# EAGLE board CT_schematic (EAGLE 7.6.0)

Size 100 x 80 mm. Coordinates in mm from the lower left corner, seen from the top.
Outline: 0,0 100,0 100,80 0,80 0,0
Copper layers (1*16): Top 0.035mm / dielectric 1.5mm / Bottom 0.035mm
Design rules "default": minimum track width 10mil, minimum drill 24mil, track to track 8mil, track to pad 8mil, pad to pad 8mil, via to via 8mil, smd to smd 8mil, copper to edge 40mil, drill to drill 8mil, minimum pad ring 10mil, minimum via ring 8mil, stop-mask expansion 4mil, vias tented up to drill 0mil, thermal gap 10mil

## Footprints (pad centres in the part's own frame; a part is rotated, then mirrored left to right if it is on the bottom)
C0603 = smd 0.8 x 0.8: 1 -0.762,0; 2 0.762,0
C0402 = smd 0.5 x 0.5: 1 -0.508,0; 2 0.508,0
C0805 = smd 1.2 x 1.3: 1 -1.016,0; 2 1.016,0
C1206 = smd 1.3 x 1.6: 1 -1.524,0; 2 1.524,0
C1210 = smd 1.2 x 2.5: 1 -1.524,0; 2 1.524,0
EXV-9H = smd 3.505 x 1.676: 1 -2.857,0; 2 2.857,0
L0603 = smd 0.8 x 0.8: 1 -0.762,0; 2 0.762,0
PJ-037B_PACKAGE = drill 3.7 square: 1 12,0 | drill 3.2 square: 2 6,0
R0603 = smd 0.8 x 0.8: 1 -0.762,0; 2 0.762,0
LQFP144 = smd 0.35 x 1.35: 1 -8.75,-10.625; 2 -8.25,-10.625; 3 -7.75,-10.625; 4 -7.25,-10.625; 5 -6.75,-10.625; 6 -6.25,-10.625; 7 -5.75,-10.625; 8 -5.25,-10.625; 9 -4.75,-10.625; 10 -4.25,-10.625; 11 -3.75,-10.625; 12 -3.25,-10.625; 13 -2.75,-10.62; 14 -2.25,-10.625; 15 -1.75,-10.625; 16 -1.25,-10.625; 17 -0.75,-10.625; 18 -0.25,-10.625; 19 0.25,-10.625; 20 0.75,-10.625; 21 1.25,-10.625; 22 1.75,-10.625; 23 2.25,-10.625; 24 2.75,-10.62; 25 3.25,-10.625; 26 3.75,-10.625; 27 4.25,-10.625; 28 4.75,-10.625; 29 5.25,-10.625; 30 5.75,-10.625; 31 6.25,-10.625; 32 6.75,-10.625; 33 7.25,-10.625; 34 7.75,-10.625; 35 8.25,-10.625; 36 8.75,-10.625; 73 8.75,10.625; 74 8.25,10.625; 75 7.75,10.625; 76 7.25,10.625; 77 6.75,10.625; 78 6.25,10.625; 79 5.75,10.625; 80 5.25,10.625; 81 4.75,10.625; 82 4.25,10.625; 83 3.75,10.625; 84 3.25,10.625; 85 2.75,10.625; 86 2.25,10.625; 87 1.75,10.625; 88 1.25,10.625; 89 0.75,10.625; 90 0.25,10.625; 91 -0.25,10.625; 92 -0.75,10.625; 93 -1.25,10.625; 94 -1.75,10.625; 95 -2.25,10.625; 96 -2.75,10.625; 97 -3.25,10.625; 98 -3.75,10.625; 99 -4.25,10.625; 100 -4.75,10.625; 101 -5.25,10.625; 102 -5.75,10.625; 103 -6.25,10.625; 104 -6.75,10.625; 105 -7.25,10.625; 106 -7.75,10.625; 107 -8.25,10.625; 108 -8.75,10.625 | smd 1.35 x 0.35: 37 10.625,-8.75; 38 10.625,-8.25; 39 10.625,-7.75; 40 10.625,-7.25; 41 10.625,-6.75; 42 10.625,-6.25; 43 10.625,-5.75; 44 10.625,-5.25; 45 10.625,-4.75; 46 10.625,-4.25; 47 10.625,-3.75; 48 10.625,-3.25; 49 10.625,-2.75; 50 10.625,-2.25; 51 10.625,-1.75; 52 10.625,-1.25; 53 10.625,-0.75; 54 10.625,-0.25; 55 10.625,0.25; 56 10.625,0.75; 57 10.625,1.25; 58 10.625,1.75; 59 10.625,2.25; 60 10.625,2.75; 61 10.625,3.25; 62 10.625,3.75; 63 10.625,4.25; 64 10.625,4.75; 65 10.625,5.25; 66 10.625,5.75; 67 10.625,6.25; 68 10.625,6.75; 69 10.625,7.25; 70 10.625,7.75; 71 10.625,8.25; 72 10.625,8.75; 109 -10.625,8.75; 110 -10.625,8.25; 111 -10.625,7.75; 112 -10.625,7.25; 113 -10.625,6.75; 114 -10.625,6.25; 115 -10.625,5.75; 116 -10.625,5.25; 117 -10.625,4.75; 118 -10.625,4.25; 119 -10.625,3.75; 120 -10.625,3.25; 121 -10.625,2.75; 122 -10.625,2.25; 123 -10.625,1.75; 124 -10.625,1.25; 125 -10.625,0.75; 126 -10.625,0.25; 127 -10.625,-0.25; 128 -10.625,-0.75; 129 -10.625,-1.25; 130 -10.625,-1.75; 131 -10.625,-2.25; 132 -10.625,-2.75; 133 -10.625,-3.25; 134 -10.625,-3.75; 135 -10.625,-4.25; 136 -10.625,-4.75; 137 -10.625,-5.25; 138 -10.625,-5.75; 139 -10.625,-6.25; 140 -10.625,-6.75; 141 -10.625,-7.25; 142 -10.625,-7.75; 143 -10.625,-8.25; 144 -10.625,-8.75
10100565 = smd 0.8 x 2.35: 1 0,0; 2 1.25,0; 3 2.55,0; 4 4.25,0; 5 5.43,0; 6 6.68,0; 7 7.93,0; 8 9.18,0; 9 11.67,0; 10 14.18,0; 11 15.43,0; 12 16.68,0; 13 17.93,0; 14 19.18,0; 15 21.68,0 | smd 1.5 x 3.1: 16 23.495,-1.375; 20 25.685,-22.875 | smd 1.55 x 3.1: 17 -1.815,-1.375; 21 -1.815,-22.875 | drill 1.1 pad 1.1: 18 21.68,-2.375; 19 0.68,-2.375
SSOP-28 = smd 1.5 x 0.4: 1 -3.625,4.225; 2 -3.625,3.575; 3 -3.625,2.925; 4 -3.625,2.275; 5 -3.625,1.625; 6 -3.625,0.975; 7 -3.625,0.325; 8 -3.625,-0.325; 9 -3.625,-0.975; 10 -3.625,-1.625; 11 -3.625,-2.275; 12 -3.625,-2.925; 13 -3.625,-3.575; 14 -3.625,-4.225; 15 3.625,-4.225; 16 3.625,-3.575; 17 3.625,-2.925; 18 3.625,-2.275; 19 3.625,-1.625; 20 3.625,-0.975; 21 3.625,-0.325; 22 3.625,0.325; 23 3.625,0.975; 24 3.625,1.625; 25 3.625,2.275; 26 3.625,2.925; 27 3.625,3.575; 28 3.625,4.225
HTSS-105-01-G-D = drill 1 pad 1.8 square: 1 0,0 | drill 1 pad 1.8: 2 0,2.54; 3 2.54,0; 4 2.54,2.54; 5 5.08,0; 6 5.08,2.54; 7 7.62,0; 8 7.62,2.54; 9 10.16,0; 10 10.16,2.54
QFN-24 = smd 0.7 x 0.305: 1 -1.815,1.25; 2 -1.815,0.75; 3 -1.815,0.25; 4 -1.815,-0.25; 5 -1.815,-0.73; 6 -1.815,-1.25; 13 1.815,-1.25; 14 1.815,-0.75; 15 1.815,-0.25; 16 1.815,0.25; 17 1.815,0.75; 18 1.815,1.25 | smd 0.305 x 0.7: 7 -1.25,-1.815; 8 -0.75,-1.815; 9 -0.25,-1.815; 10 0.25,-1.815; 11 0.75,-1.815; 12 1.25,-1.815; 19 1.25,1.815; 20 0.75,1.815; 21 0.25,1.815; 22 -0.25,1.815; 23 -0.75,1.815; 24 -1.25,1.815 | smd 2.591 x 2.591: 25 0,0
MICRO_USB_AB = smd 0.4 x 1.35: 1 1.3,0.26; 2 0.65,0.26; 3 0,0.26; 4 -0.65,0.26; 5 -1.3,0.26 | drill 0.6 pad 0.95 long: 6 4.175,-2.54; 7 -4.175,-2.54 | drill 0.7 pad 1.1 long: 8 -2.225,0.46; 9 2.225,0.46
SOT143B = smd 1 x 0.7: 1 -0.75,-1 | smd 0.6 x 0.7: 2 0.95,-1; 3 0.95,1; 4 -0.95,1
SOT-23-6 = smd 1.1 x 0.6: 1 -1.4,0.95; 2 -1.4,0; 3 -1.4,-0.95; 4 1.4,-0.95; 5 1.4,0; 6 1.4,0.95
ASEK = smd 1.4 x 1: 1 -1.1,-0.8; 2 1.1,-0.8; 3 1.1,0.8; 4 -1.1,0.8
ASFL1 = smd 1.7 x 1.5: 1 -1.27,-1.1; 2 1.27,-1.1; 3 1.27,1.1; 4 -1.27,1.1
WSON-8 = smd 0.3 x 0.6: 1 -0.75,0; 2 0.05,0; 3 0.85,0; 4 1.65,0; 5 1.65,3.8; 6 0.85,3.8; 7 0.05,3.8; 8 -0.75,3.8 | smd 3 x 2.6: PAD 0.45,1.9
SON-6 = smd 0.55 x 0.3: 1 -0.355,0.5 | smd 0.52 x 0.3: 2 -0.37,0; 3 -0.37,-0.5; 4 0.37,-0.5; 5 0.37,0; 6 0.37,0.5
SW_4-1437565-2 = smd 1.4 x 2.1: 1 -2.23,4.55; 2 -2.23,-4.55; 3 2.23,4.55; 4 2.23,-4.55
LGM67K-G1J2-24-Z = smd 0.8 x 1.4: A -2,0; C 0,0
NC7SZ125M5X = smd 1.3 x 0.7: 1 -1.3,0.95; 2 -1.3,0; 3 -1.3,-0.95; 4 1.3,-0.95; 5 1.3,0.95

## Placement (x,y rotation side)
C1  1e-06  [C0603]  -19.05,83.82 0 top  (outside the outline)
C2  1e-07  [C0603]  -22.86,83.82 0 top  (outside the outline)
C3  1e-07  [C0603]  -26.67,83.82 0 top  (outside the outline)
C4  1e-07  [C0603]  -30.48,83.82 0 top  (outside the outline)
C5  1e-07  [C0603]  -34.29,83.82 0 top  (outside the outline)
C6  1e-07  [C0603]  -38.1,83.82 0 top  (outside the outline)
C7  1e-07  [C0603]  -41.91,83.82 0 top  (outside the outline)
C8  1e-07  [C0603]  -45.72,83.82 0 top  (outside the outline)
C9  1e-07  [C0603]  -49.53,83.82 0 top  (outside the outline)
C10  1e-07  [C0603]  -53.34,83.82 0 top  (outside the outline)
C11  1e-07  [C0603]  -57.15,83.82 0 top  (outside the outline)
C12  1e-07  [C0603]  -60.96,83.82 0 top  (outside the outline)
C13  1e-07  [C0603]  -64.77,83.82 0 top  (outside the outline)
C14  4.7e-06  [C0603]  -74.93,78.74 0 top  (outside the outline)
C15  2.2e-06  [C0603]  -78.74,78.74 0 top  (outside the outline)
C16  2.2e-06  [C0603]  -82.55,78.74 0 top  (outside the outline)
C17  1e-07  [C0603]  -68.58,83.82 0 top  (outside the outline)
C18  1e-07  [C0603]  -72.39,83.82 0 top  (outside the outline)
C19  1e-08  [C0603]  -76.2,83.82 0 top  (outside the outline)
C20  1e-06  [C0603]  -80.01,83.82 0 top  (outside the outline)
C21  1e-07  [C0402]  -57.15,88.9 0 top  (outside the outline)
C22  1e-05  [C0805]  -15.24,73.66 0 top  (outside the outline)
C23  1e-07  [C0402]  -60.96,88.9 0 top  (outside the outline)
C24  1e-07  [C0402]  -64.77,88.9 0 top  (outside the outline)
C25  1e-07  [C0402]  -68.58,88.9 0 top  (outside the outline)
C26  1e-07  [C0402]  -72.39,88.9 0 top  (outside the outline)
C27  1e-07  [C0402]  -76.2,88.9 0 top  (outside the outline)
C28  1e-08  [C0402]  -80.01,88.9 0 top  (outside the outline)
C29  2.2e-06  [C0603]  -15.24,83.82 0 top  (outside the outline)
C30  1e-08  [C0402]  -83.82,88.9 0 top  (outside the outline)
C31  1e-08  [C0402]  -15.24,93.98 0 top  (outside the outline)
C32  1e-06  [C0603]  -83.82,83.82 0 top  (outside the outline)
C33  1e-08  [C0402]  -19.05,93.98 0 top  (outside the outline)
C34  1e-08  [C0402]  -22.86,93.98 0 top  (outside the outline)
C35  1e-08  [C0402]  -26.67,93.98 0 top  (outside the outline)
C36  1e-06  [C0603]  -15.24,88.9 0 top  (outside the outline)
C37  1e-05  [C0805]  -20.32,73.66 0 top  (outside the outline)
C38  1e-08  [C0402]  -30.48,93.98 0 top  (outside the outline)
C39  1e-05  [C1206]  -59.69,66.04 0 top  (outside the outline)
C40  1e-05  [C1210]  -46.99,66.04 0 top  (outside the outline)
C41  1e-08  [C0402]  -34.29,93.98 0 top  (outside the outline)
C42  1e-05  [C1206]  -66.04,66.04 0 top  (outside the outline)
C43  1e-05  [C1210]  -53.34,66.04 0 top  (outside the outline)
C44  1e-07  [C0402]  -38.1,93.98 0 top  (outside the outline)
C45  0.0001  [EXV-9H]  -72.39,57.15 0 top  (outside the outline)
C46  0.0001  [EXV-9H]  -17.78,67.31 0 top  (outside the outline)
C47  1e-08  [C0402]  -41.91,93.98 0 top  (outside the outline)
C48  1e-08  [C0402]  -45.72,93.98 0 top  (outside the outline)
F1  240.0  [L0603]  -19.05,88.9 0 top  (outside the outline)
J1  PJ-037B  [PJ-037B_PACKAGE]  -27.94,36.83 0 top  (outside the outline)
R2  1000.0  [R0603]  -22.86,88.9 0 top  (outside the outline)
R4  4700.0  [R0603]  -26.67,88.9 0 top  (outside the outline)
R5  4700.0  [R0603]  -30.48,88.9 0 top  (outside the outline)
R6  10000.0  [R0603]  -45.72,78.74 0 top  (outside the outline)
R7  10000.0  [R0603]  -50.8,78.74 0 top  (outside the outline)
R8  100000.0  [R0603]  -25.4,73.66 0 top  (outside the outline)
R9  100000.0  [R0603]  -30.48,73.66 0 top  (outside the outline)
R10  100000.0  [R0603]  -35.56,73.66 0 top  (outside the outline)
R11  100000.0  [R0603]  -40.64,73.66 0 top  (outside the outline)
R12  100000.0  [R0603]  -45.72,73.66 0 top  (outside the outline)
R13  100000.0  [R0603]  -50.8,73.66 0 top  (outside the outline)
R14  100000.0  [R0603]  -55.88,73.66 0 top  (outside the outline)
R15  100000.0  [R0603]  -60.96,73.66 0 top  (outside the outline)
R16  100000.0  [R0603]  -66.04,73.66 0 top  (outside the outline)
R17  100000.0  [R0603]  -71.12,73.66 0 top  (outside the outline)
R18  100000.0  [R0603]  -76.2,73.66 0 top  (outside the outline)
R19  100000.0  [R0603]  -81.28,73.66 0 top  (outside the outline)
R20  47000.0  [R0603]  -55.88,78.74 0 top  (outside the outline)
R21  8060.0  [R0603]  -34.29,88.9 0 top  (outside the outline)
R22  100000.0  [R0603]  -15.24,78.74 0 top  (outside the outline)
R23  36000.0  [R0603]  -60.96,78.74 0 top  (outside the outline)
R24  100000.0  [R0603]  -20.32,78.74 0 top  (outside the outline)
R25  100000.0  [R0603]  -25.4,78.74 0 top  (outside the outline)
R26  2231.0  [R0603]  -38.1,88.9 0 top  (outside the outline)
R27  1000.0  [R0603]  -41.91,88.9 0 top  (outside the outline)
R28  100000.0  [R0603]  -30.48,78.74 0 top  (outside the outline)
R29  3900.0  [R0603]  -45.72,88.9 0 top  (outside the outline)
R30  1000.0  [R0603]  -49.53,88.9 0 top  (outside the outline)
R31  10000.0  [R0603]  -66.04,78.74 0 top  (outside the outline)
R32  10000.0  [R0603]  -71.12,78.74 0 top  (outside the outline)
R33  9100.0  [R0603]  -53.34,88.9 0 top  (outside the outline)
R34  680000.0  [R0603]  -35.56,78.74 0 top  (outside the outline)
R35  120000.0  [R0603]  -40.64,78.74 0 top  (outside the outline)
U1  STM32F407ZGT6  [LQFP144]  -55.88,11.43 0 top  (outside the outline)
U2  10100565  [10100565]  -40.64,25.4 0 top  (outside the outline)
U3  ST3241EBPR  [SSOP-28]  -73.66,7.62 0 top  (outside the outline)
U4  HTSS-105-01-G-D  [HTSS-105-01-G-D]  -76.2,34.29 0 top  (outside the outline)
U5  USB3317C-CP-TR  [QFN-24]  -39.37,66.04 0 top  (outside the outline)
U6  47590-0001  [MICRO_USB_AB]  -36.83,38.1 0 top  (outside the outline)
U7  prtr5v0u2ax  [SOT143B]  -58.42,93.98 0 top  (outside the outline)
U8  MAX4995AAUT+T  [SOT-23-6]  -71.12,64.77 0 top  (outside the outline)
U9  ASEK-32.768KHz-ECST  [ASEK]  -63.5,57.15 0 top  (outside the outline)
U10  ASFL1-25MHZ-NCS  [ASFL1]  -26.67,58.42 0 top  (outside the outline)
U11  ASFL1-26MHZ-NCS  [ASFL1]  -43.18,58.42 0 top  (outside the outline)
U12  LP2951ACSDX/NOPB  [WSON-8]  -68.58,46.99 0 top  (outside the outline)
U13  LP3878SDX-ADJ/NOPB  [WSON-8]  -30.48,46.99 0 top  (outside the outline)
U14  LP3878SDX-ADJ/NOPB  [WSON-8]  -50.8,46.99 0 top  (outside the outline)
U15  TPS3895ADRYR  [SON-6]  -62.23,92.71 0 top  (outside the outline)
U16  4-1437565-2  [SW_4-1437565-2]  -57.15,35.56 0 top  (outside the outline)
U17  Q65110A2395  [LGM67K-G1J2-24-Z]  -27.94,66.04 0 top  (outside the outline)
U18  nc7sz125m5x  [NC7SZ125M5X]  -76.2,64.77 0 top  (outside the outline)
U19  nc7sz125m5x  [NC7SZ125M5X]  -82.55,64.77 0 top  (outside the outline)

## Library data of the parts
C1-C48 F1 J1 R2 R4-R35 U1-U19 = circuit_tree

## Nets
CLK_U1_8: U1.8 U9.3
CLK_U1_23: U1.23 U10.3
CLK_U5_23: U5.23 U11.3
GND: C1.2 C2.2 C3.2 C4.2 C5.2 C6.2 C7.2 C8.2 C9.2 C10.2 C11.2 C12.2 C13.2 C14.2 C15.2 C16.2 C17.2 C18.2 C19.2 C20.2 C21.2 C22.2 C23.2 C26.2 C27.2 C28.2 C29.2 C30.2 C31.2 C32.2 C33.2 C34.2 C35.2 C36.2 C37.2 C38.2 C39.2 C40.2 C41.2 C42.2 C43.2 C44.2 C45.2 C46.2 C47.2 C48.2 J1.2 R2.2 R7.2 R20.2 R21.2 R24.2 R27.2 R30.2 R33.2 R35.2 U1.16 U1.31 U1.38 U1.51 U1.61 U1.83 U1.94 U1.107 U1.120 U1.130 U2.6 U2.10 U2.12 U2.16 U2.17 U2.20 U2.21 U3.23 U3.25 U4.9 U5.25 U6.5 U6.6 U6.7 U6.8 U6.9 U7.1 U8.2 U9.2 U10.2 U11.2 U12.3 U12.4 U12.PAD U13.3 U13.PAD U14.3 U14.PAD U15.2 U17.C U18.1 U18.3 U19.1 U19.3
NET_U1_25: R4.1 U1.25 U18.4
NET_U1_33: C17.1 C18.1 C19.1 C20.1 F1.1 U1.32 U1.33
NET_U1_71: C15.1 U1.71
NET_U1_106: C16.1 U1.106
NET_U1_138: R7.1 U1.138
NET_U1_141: U17.A
NET_U1_142: U16.3 U16.4
NET_U1_143: R6.1 U1.143
NET_U2_1: R10.1 U2.1
NET_U2_2: R9.1 U2.2
NET_U2_18: U2.18 U2.19
NET_U3_1: C25.1 U3.1
NET_U3_2: C25.2 U3.2
NET_U3_3: C27.1 U3.3
NET_U3_22: R19.1 U3.22
NET_U3_24: C24.2 U3.24
NET_U3_27: C26.1 U3.27
NET_U3_28: C24.1 U3.28
NET_U4_3: U3.4 U4.3
NET_U4_4: U3.5 U4.4
NET_U4_5: U3.9 U4.5
NET_U4_6: U3.10 U4.6
NET_U5_4: C29.1 U5.4
NET_U5_22: R5.1 U5.22 U19.4
NET_U5_24: R21.1 U5.24
NET_U6_1: C32.1 U5.2 U6.1 U7.4 U8.1
NET_U6_2: U5.5 U6.2 U7.3
NET_U6_3: U5.6 U6.3 U7.2
NET_U6_4: U5.1 U6.4
NET_U8_1: U8.1
NET_U8_3: R20.1 U8.3
NET_U8_4: U5.7 U8.4
NET_U12_5: R22.1 U12.5
NET_U12_7: R23.2 R24.1 U12.7
NET_U13_1: C38.1 U13.1
NET_U13_6: R26.2 R27.1 U13.6
NET_U13_8: R25.1 U13.8
NET_U14_1: C41.1 U14.1
NET_U14_6: R29.2 R30.1 U14.6
NET_U14_8: R28.1 U14.8
NET_U15_1: R32.1 R33.1 U15.1
NET_U15_3: R34.2 R35.1 U15.3
NET_U15_4: R31.1 U15.4 U18.2 U19.2
NET_U16_1: R2.1 U16.1 U16.2
PROC_SDIO_CK: R8.1 U1.113 U2.8
PROC_SDIO_D0: R11.1 U1.98 U2.4
PROC_SDIO_D1: R12.1 U1.99 U2.3
PROC_SDIO_D2: R13.1 U1.111 U2.15
PROC_SDIO_D3: R14.1 U1.112 U2.14
PROC_SDIO_D4: R15.1 U1.139 U2.13
PROC_SDIO_D5: R16.1 U1.140 U2.11
PROC_SDIO_D6: R17.1 U1.96 U2.7
PROC_SDIO_D7: R18.1 U1.97 U2.5
PROC_UART4_RX: U1.35 U3.19
PROC_UART4_TX: U1.34 U3.14
PROC_USB_OTG_HS_ULPI_CK: U1.41 U5.12
PROC_USB_OTG_HS_ULPI_D0: U1.37 U5.16
PROC_USB_OTG_HS_ULPI_D1: U1.46 U5.15
PROC_USB_OTG_HS_ULPI_D2: U1.47 U5.14
PROC_USB_OTG_HS_ULPI_D3: U1.69 U5.13
PROC_USB_OTG_HS_ULPI_D4: U1.70 U5.11
PROC_USB_OTG_HS_ULPI_D5: U1.73 U5.10
PROC_USB_OTG_HS_ULPI_D6: U1.74 U5.9
PROC_USB_OTG_HS_ULPI_D7: U1.135 U5.8
PROC_USB_OTG_HS_ULPI_DIR: U1.28 U5.19
PROC_USB_OTG_HS_ULPI_NXT: U1.29 U5.18
PROC_USB_OTG_HS_ULPI_STP: U1.26 U5.20
VCC_S1_10V2: C36.1 C39.1 C42.1 C45.1 C46.1 J1.1 R25.2 R28.2 U12.8 U13.4 U14.4
VCC_TIER1_1V8: C21.1 C22.1 C31.1 C37.1 C47.1 C48.1 R8.2 R9.2 R10.2 R11.2 R12.2 R13.2 R14.2 R15.2 R16.2 R17.2 R18.2 R22.2 R23.1 U2.9 U5.21 U12.1 U18.5 U19.5
VCC_TIER1_3V3: C1.1 C2.1 C3.1 C4.1 C5.1 C6.1 C7.1 C8.1 C9.1 C10.1 C11.1 C12.1 C13.1 C14.1 C23.1 C28.1 C30.1 C33.1 C34.1 C35.1 C40.1 C44.1 F1.2 R4.2 R5.2 R6.2 R19.2 R26.1 R31.2 R32.2 R34.1 U1.6 U1.17 U1.30 U1.39 U1.52 U1.62 U1.72 U1.84 U1.95 U1.108 U1.121 U1.131 U1.144 U3.26 U5.3 U5.17 U9.4 U10.4 U11.4 U13.5 U15.6
VCC_TIER1_5V0: C43.1 R29.1 U8.5 U14.5

## Tracks (layer width: path | path; a pad name or v marks a point on that pad's centre or on a via)
CLK_U1_8  (1 unrouted)
CLK_U1_23  (1 unrouted)
CLK_U5_23  (1 unrouted)
GND  (99 unrouted)
NET_U1_25  (2 unrouted)
NET_U1_33  (6 unrouted)
NET_U1_71  (1 unrouted)
NET_U1_106  (1 unrouted)
NET_U1_138  (1 unrouted)
NET_U1_142  (1 unrouted)
NET_U1_143  (1 unrouted)
NET_U2_1  (1 unrouted)
NET_U2_2  (1 unrouted)
NET_U2_18  (1 unrouted)
NET_U3_1  (1 unrouted)
NET_U3_2  (1 unrouted)
NET_U3_3  (1 unrouted)
NET_U3_22  (1 unrouted)
NET_U3_24  (1 unrouted)
NET_U3_27  (1 unrouted)
NET_U3_28  (1 unrouted)
NET_U4_3  (1 unrouted)
NET_U4_4  (1 unrouted)
NET_U4_5  (1 unrouted)
NET_U4_6  (1 unrouted)
NET_U5_4  (1 unrouted)
NET_U5_22  (2 unrouted)
NET_U5_24  (1 unrouted)
NET_U6_1  (4 unrouted)
NET_U6_2  (2 unrouted)
NET_U6_3  (2 unrouted)
NET_U6_4  (1 unrouted)
NET_U8_3  (1 unrouted)
NET_U8_4  (1 unrouted)
NET_U12_5  (1 unrouted)
NET_U12_7  (2 unrouted)
NET_U13_1  (1 unrouted)
NET_U13_6  (2 unrouted)
NET_U13_8  (1 unrouted)
NET_U14_1  (1 unrouted)
NET_U14_6  (2 unrouted)
NET_U14_8  (1 unrouted)
NET_U15_1  (2 unrouted)
NET_U15_3  (2 unrouted)
NET_U15_4  (3 unrouted)
NET_U16_1  (2 unrouted)
PROC_SDIO_CK  (2 unrouted)
PROC_SDIO_D0  (2 unrouted)
PROC_SDIO_D1  (2 unrouted)
PROC_SDIO_D2  (2 unrouted)
PROC_SDIO_D3  (2 unrouted)
PROC_SDIO_D4  (2 unrouted)
PROC_SDIO_D5  (2 unrouted)
PROC_SDIO_D6  (2 unrouted)
PROC_SDIO_D7  (2 unrouted)
PROC_UART4_RX  (1 unrouted)
PROC_UART4_TX  (1 unrouted)
PROC_USB_OTG_HS_ULPI_CK  (1 unrouted)
PROC_USB_OTG_HS_ULPI_D0  (1 unrouted)
PROC_USB_OTG_HS_ULPI_D1  (1 unrouted)
PROC_USB_OTG_HS_ULPI_D2  (1 unrouted)
PROC_USB_OTG_HS_ULPI_D3  (1 unrouted)
PROC_USB_OTG_HS_ULPI_D4  (1 unrouted)
PROC_USB_OTG_HS_ULPI_D5  (1 unrouted)
PROC_USB_OTG_HS_ULPI_D6  (1 unrouted)
PROC_USB_OTG_HS_ULPI_D7  (1 unrouted)
PROC_USB_OTG_HS_ULPI_DIR  (1 unrouted)
PROC_USB_OTG_HS_ULPI_NXT  (1 unrouted)
PROC_USB_OTG_HS_ULPI_STP  (1 unrouted)
VCC_S1_10V2  (10 unrouted)
VCC_TIER1_1V8  (23 unrouted)
VCC_TIER1_3V3  (51 unrouted)
VCC_TIER1_5V0  (3 unrouted)